# Altium PCB kill_switch-pcb.PcbDoc
Units mm, origin at the board's own origin, x right, y up, seen from the top; angles counter-clockwise.
Board outline 25 x 28 mm, 2 copper layers (Top Layer, Bottom Layer); 7 components, 6 nets, 17 pads, 0 vias.
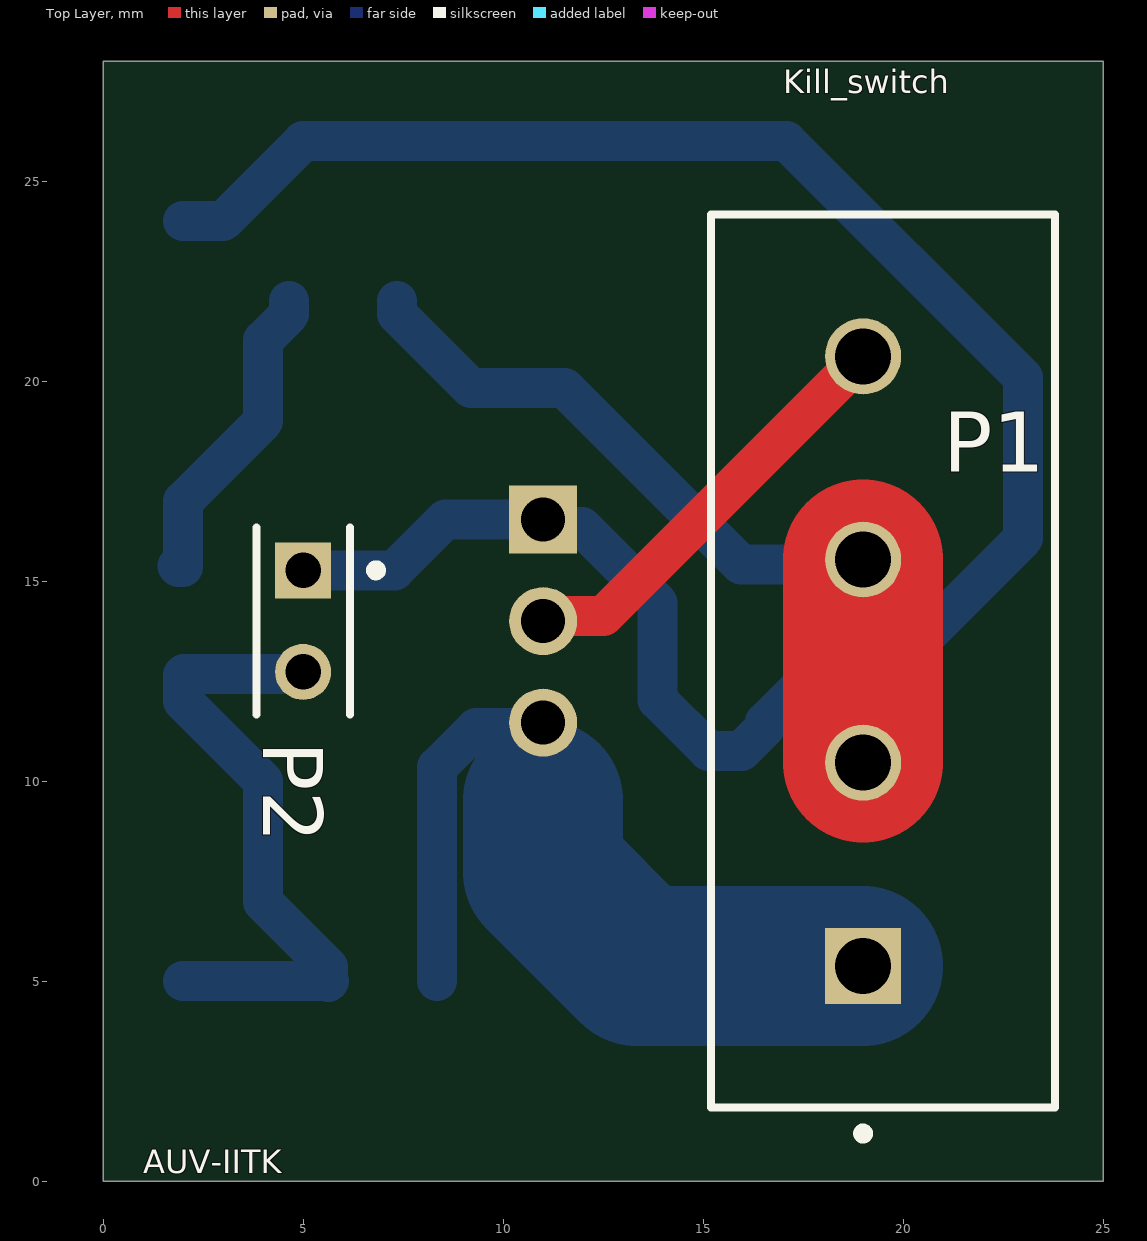
[diagram p0: Top Layer view]
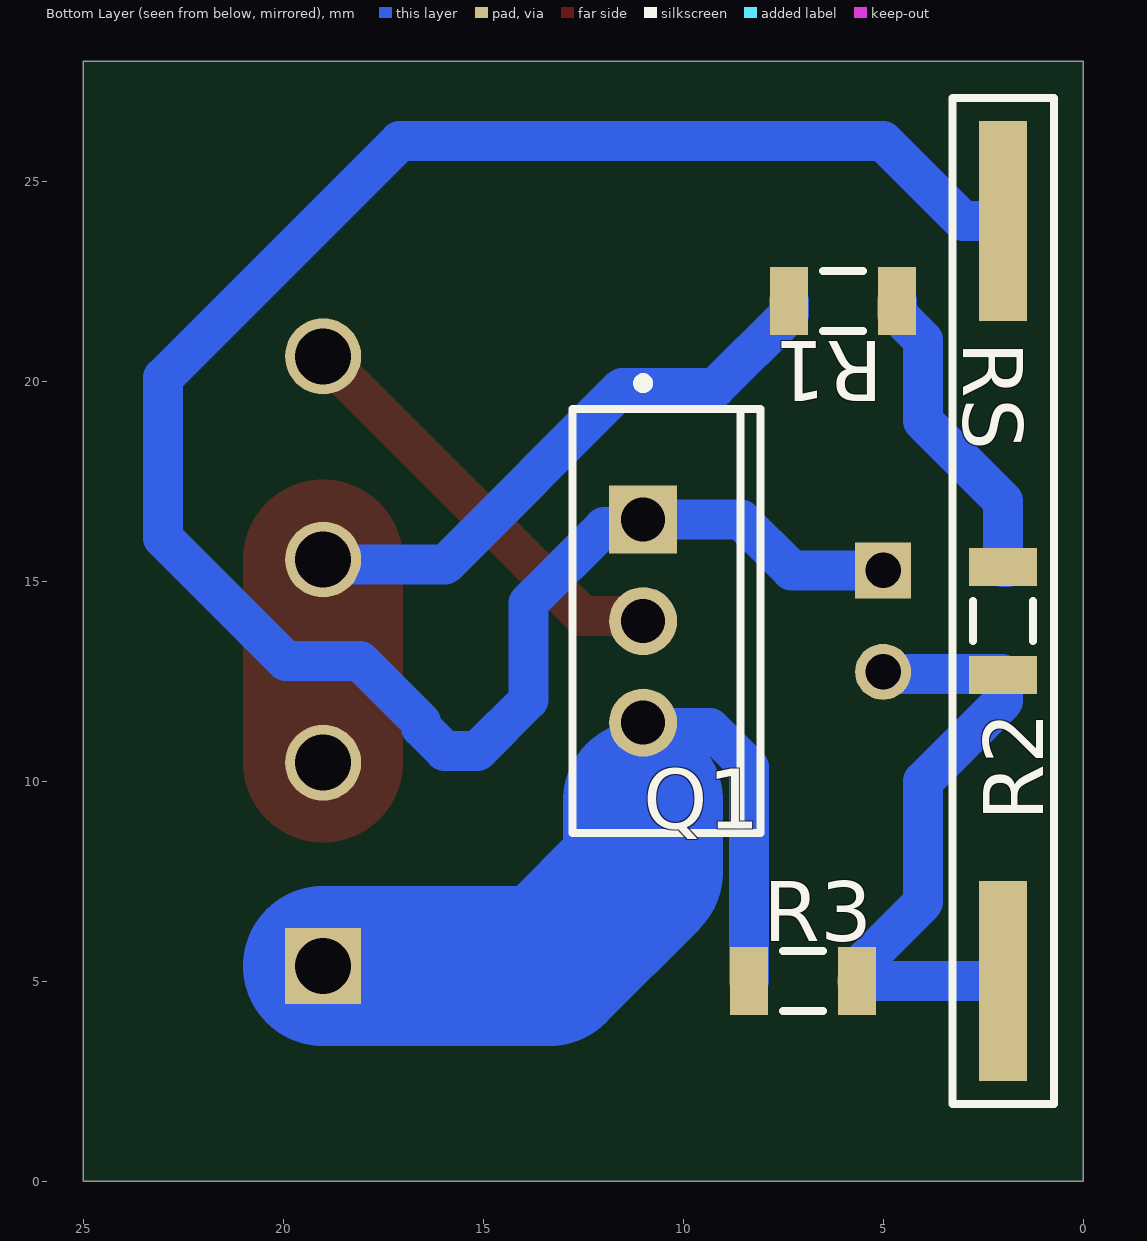
[diagram p1: Bottom Layer view, seen from below]

## Layer stack, top to bottom
Top Solder: solder mask 0.0102, Solder Resist, Dk 3.5
Top Layer: signal copper 0.0356
Dielectric 1: dielectric 0.32, FR-4, Dk 4.8
Bottom Layer: signal copper 0.0356
Bottom Solder: solder mask 0.0102, Solder Resist, Dk 3.5

## Board outline
0,0 25,0 25,28 0,28

## Design rules (kind name [scope] priority, off if disabled: settings)
BoardOutlineClearance [All] p1: gap=0.5 ignorepadtopadclearanceinfootprint=FALSE
Clearance [All] p1: gap=0.254 ignorepadtopadclearanceinfootprint=FALSE
PolygonConnect [All] p1: connectstyle=Relief reliefconductorwidth=0.254 reliefentries=4 polygonreliefangle="90 Angle" airgapwidth=0.254
RoutingVias [All] p1: holewidth=0.711 width=1.27 viastyle="Through Hole" minholewidth=0.711 minwidth=1.27 maxholewidth=0.711 maxwidth=1.27
SolderMaskExpansion [All] p1: expansion=0.102
UnRoutedNet [All] p1: checkbadconnections=TRUE
Width 25V-power_trace [(InNet('IN+') or InNet('IN-') or InNet('OUT-'))] p1: maxlimit=4 minlimit=1 preferedwidth=3
Width Default_Width [All] p2: maxlimit=2 minlimit=0.254 preferedwidth=1
29 further rules are at their usual default settings.

## Classes and differential pairs
component class kill_switch-sch: P1 P2 Q1 R1 R2 R3

## Components (designator, comment, footprint, x,y, rotation, side; value= is the part's Value field where it differs from the comment)
P1 "1755752" PHOE-1755752-4_V 19,13 r90 top
P2 "5-146280-2" TECO-5-146280-2_V 5,14 r270 top
Q1 "IRFZ44" VISH-TO-220AB-3_A 11,14 r180 bottom
R1 "6M8 5% 1206(3216)" RESC1206(3216)_L 6,22 r0 bottom value="6800000.00 Ohm"
R2 "6M8 5% 1206(3216)" RESC1206(3216)_L 2,14 r90 bottom value="6800000.00 Ohm"
R3 "6M8 5% 1206(3216)" RESC1206(3216)_L 7,5 r180 bottom value="6800000.00 Ohm"
RS "Magnetic_switch" Reed_switch 2,14.5 r270 bottom

## Footprints (in the part's own frame and the unit in brackets; to place one, negate y for a bottom-side part, rotate by r counter-clockwise, add the part's x,y. Pads: shape width x height; smd on the part's side, far side on the other; paste and mask are expansions set on the pad)
PHOE-1755752-4_V [mm] "TH, 4-Leads, Body 21.32x8.6mm, Pitch 5.08mm"
  rect 1.9x1.9 hole 1.4: 1(-7.62,0)
  round 1.9 hole 1.4: 2(-2.54,0) 3(2.54,0) 4(7.62,0)
  silkscreen extent -11.93,-4.8 11.16,3.8, body extent -11.16,-4.8 11.16,3.8, height 12
Reed_switch [mm]
  rect 5x1.2 smd: 1(-9.5,0) 2(9.5,0)
  silkscreen extent -12.57,-1.27 12.57,1.27
RESC1206(3216)_L [mm] "Chip Resistor, Body 3.2x1.6mm, IPC High Density"
  rect 0.95x1.7 smd: 1(-1.35,0) 2(1.35,0)
  silkscreen extent -0.5,-0.75 0.5,0.75, body extent -1.67,-0.87 1.67,0.87, height 0.75
TECO-5-146280-2_V [mm] "Connector, 2-Leads, Body 4.67x2.34mm, Pitch 2.54mm"
  rect 1.4x1.4 hole 0.89: 1(-1.27,0)
  round 1.4 hole 0.89: 2(1.27,0)
  silkscreen extent -2.33,-1.17 2.33,1.94, body extent -2.34,-1.17 2.34,1.17, height 5.33
VISH-TO-220AB-3_A [mm] "FM, 3-Leads, Body 10.55x4.65mm, Pitch 2.54mm"
  rect 1.7x1.7 hole 1.1: 1(0,2.54)
  round 1.7 hole 1.1: 2(0,0) 3(0,-2.54)
  silkscreen extent -1.77,-5.3 2.94,6.07, body extent -1.74,-5.28 2.91,5.28, height 19.31

## Part data
P1: library part CMP-2000-05301-1, "Male Header, Pitch 5.08 mm, 1 x 4 Position, Height 12 mm, Tail Length 3.9 mm, 4-Pin THD, RoHS, Bulk", Colour=Green, Manufacturer="Phoenix Contact", Content=250pc(s), Datasheet URL=https://datasheet.ciiva.com/29210/569389-da-01-en-grundgehaeuse-1755752-250-st-29210608.pdf, Datasheet Version=Nov-13, Industrial packaging=Yes, Manufacturer part No.=1755752, Manufacturer URL=http://www.phoenixcontact.com/, Number of contacts=4, Pitch=5.08mm, Type=MSTBVA2,5/4-G-5,08
P2: library part CMP-2000-07492-1, "Male Header, Pitch 2.54 mm, 1 x 2 Position, Height 8.21 mm, Tail Length 3.05 mm, -65 to 105 degC, RoHS, Bulk", Case\/Package=100, Colour=Black, Current Rating=3A, Flammability Rating=UL94V-0, High Temperature Housing=Yes, Manufacturer="TE Connectivity", Max Current Rating=5A, Max Operating Temperature=105degC, Min Operating Temperature=-65degC, Package Description="Male Header, Pitch 2.54 mm, 1 x 2 Position, Height 8.21 mm, Tail Length 3.05 mm", Package Quantity=500, Approvals=CSA, Board Standoff=No(Without), Connector Type=Header, Contact Gender=Male, Contact Material=CopperAlloy, Contact Mating Length=0.23inch, Contact Plating=Matte, Contact Protection=No(Without), Contact Shape=Square, Datasheet URL=http://www.te.com/commerce/DocumentDelivery/DDEController?Action=showdoc&DocId=Customer+Drawing%7F146280%7FH1%7Fpdf%7FEnglish%7FENG_CD_146280_H1.pdf%7F5-146280-2, Datasheet Version="Rev. H1, 08/2016", Depth=2.34mm, Gasket=No(Without), High Speed Serial Data Connector=No, Housing Colour=Black, Housing Material=Polymer, Keyed=No, Length=4.67mm, Manufacturer URL=http://www.te.com/, Mating Alignment=No(Without), Mating Connector Lock=No(Without), Mating Post Length=0.23inch, Mount=ThroughHole, Mounting Technology=ThroughHole, Number of contacts=2, Number of Positions=2, Number of Rows=1, Orientation=Straight, Package Reference=5-146280-2, Packaging=Carton, Panel Mount Retention=No(Without), PCB Mounting Orientation=Vertical, PCB Mount Retention=Without, PCB Thickness=0.063inch, Pitch=2.54mm, Radiation Hardening=No, RoHSCompliant=true, Row Spacing=2.54mm, Selectively Loaded=No(Without), Stabilizers=No(Without), Termination=ThroughHole, Termination Post Length=0.12inch
Q1: library part CMP-2000-06461-1, "Power MOSFET, 100 VDS, -55 to 175 degC, 3-Pin TO-220AB, RoHS, Tube", Id - Continuous Drain Current=28A, Manufacturer=Vishay, Maximum Operating Temperature=+175C, Minimum Operating Temperature=-55C, Package / Case=TO-220-3, Package Description="3-Pin Flange Mount, Body 10.275 x 4.45 mm, Pitch 2.54 mm", Package Reference=TO-220AB-3, Pd - Power Dissipation=150W, Rds On - Drain-Source Resistance=77mOhms, Vds - Drain-Source Breakdown Voltage=100V, Vgs - Gate-Source Voltage=20V, &lt;PCN&gt;=http://www.mouser.com/PCN/Vishay_SIL_0182015.pdf, Brand=VishaySemiconductors, Channel Mode=Enhancement, Configuration=Single, Datasheet URL=http://www.vishay.com/docs/91021/91021.pdf, Datasheet Version="Rev. B, 03/2011", Factory Pack Quantity=50, Fall Time=43ns, Height=9.01mm, Length=10.51mm, Manufacturer URL=http://www.vishay.com/, Mounting Style=ThroughHole, Mounting Technology=ThroughHole, Number of Channels=1Channel, Package URL=http://www.vishay.com/docs/71195/to220ab.pdf, Packaging=Tube, Product Category=MOSFET, Rise Time=44ns, RoHS=NoRoHSVersionAvailable, Technology=Si, Transistor Polarity=N-Channel, Transistor Type=1N-Channel, Typical Turn-Off Delay Time=53ns, Typical Turn-On Delay Time=11ns, Unit Weight=0.211644oz, Width=4.7mm
R1 R2 R3: library part CMP-1014-00166-1, "6M8 0.25W 5% 1206 (3216 Metric)  SMD", Case-EIA=1206, Case-Metric=3216, Power="0.25 W", Tolerance="5 %", Technology=SMT
RS: library part Component_1, Catergories=reed_switch

## Nets (pads, with @x,y where several pads share a name; then routed paths per layer and width w, separated by ;. In a path a pad name is that pad's centre, name@x,y a point inside that pad or via, vN(x,y) a via of type N, cw(c..) or ccw(c..) an arc to the next point about the centre after c; other vN are vias at no path point)
IN+: P1.2 P1.3 R1.2 | length 19.9
  Top Layer w1: P1.3@18.756,15.54 P1.3
  Top Layer w4: P1.2 P1.3
  Bottom Layer w1: R1.2 7.35,21.675 9.194,19.831 11.531,19.831 15.948,15.413 18.873,15.413 P1.3
IN-: P1.1 Q1.3 R3.1 | length 19.5
  Bottom Layer w1: R3.1 8.35,10.35 9.326,11.326 10.866,11.326 Q1.3 ; P1.1@18.81,5.19 P1.1
  Bottom Layer w4: 11,9.515 11,7.723 13.343,5.38 P1.1
NetR1_1: R1.1 R2.2 | length 7.9
  Bottom Layer w1: R2.2@1.865,15.375 1.89,15.35 R2.2 2,17 4,19 4,21.025 4.65,21.675 R1.1
OUT-: P1.4 Q1.2 | length 10.7
  Top Layer w1: Q1.2 11.134,14.134 12.514,14.134 P1.4
SW+: P2.2 R2.1 R3.2 RS.2 | length 15.9
  Bottom Layer w1: RS.2 R3.2@5.625,5 ; P2.2 4.945,12.675 2.025,12.675 R2.1 2,12 4,10 4,6.975 5.625,5.35 R3.2@5.625,5 ; R3.2 5.625,4.975 R3.2@5.625,5
SW-: P2.1 Q1.1 RS.1 | length 52.9
  Bottom Layer w1: RS.1 3,24 5,26 17.085,26 23,20.085 23,16.075 19.925,13 18.075,13 16.55,11.475 16.55,11.343 15.964,10.757 15.136,10.757 13.865,12.028 13.865,14.458 11.973,16.35 11.19,16.35 Q1.1 8.555,16.54 7.285,15.27 P2.1

## Silkscreen, mask and mechanical layers (free items; w line width, h text height)
Top Overlay:
  text "Kill_switch" at 17,27 h1
  text "AUV-IITK" at 1,0 h1